# EAGLE board pcbTA 2 habis revisi - Copy (EAGLE 9.6.2)
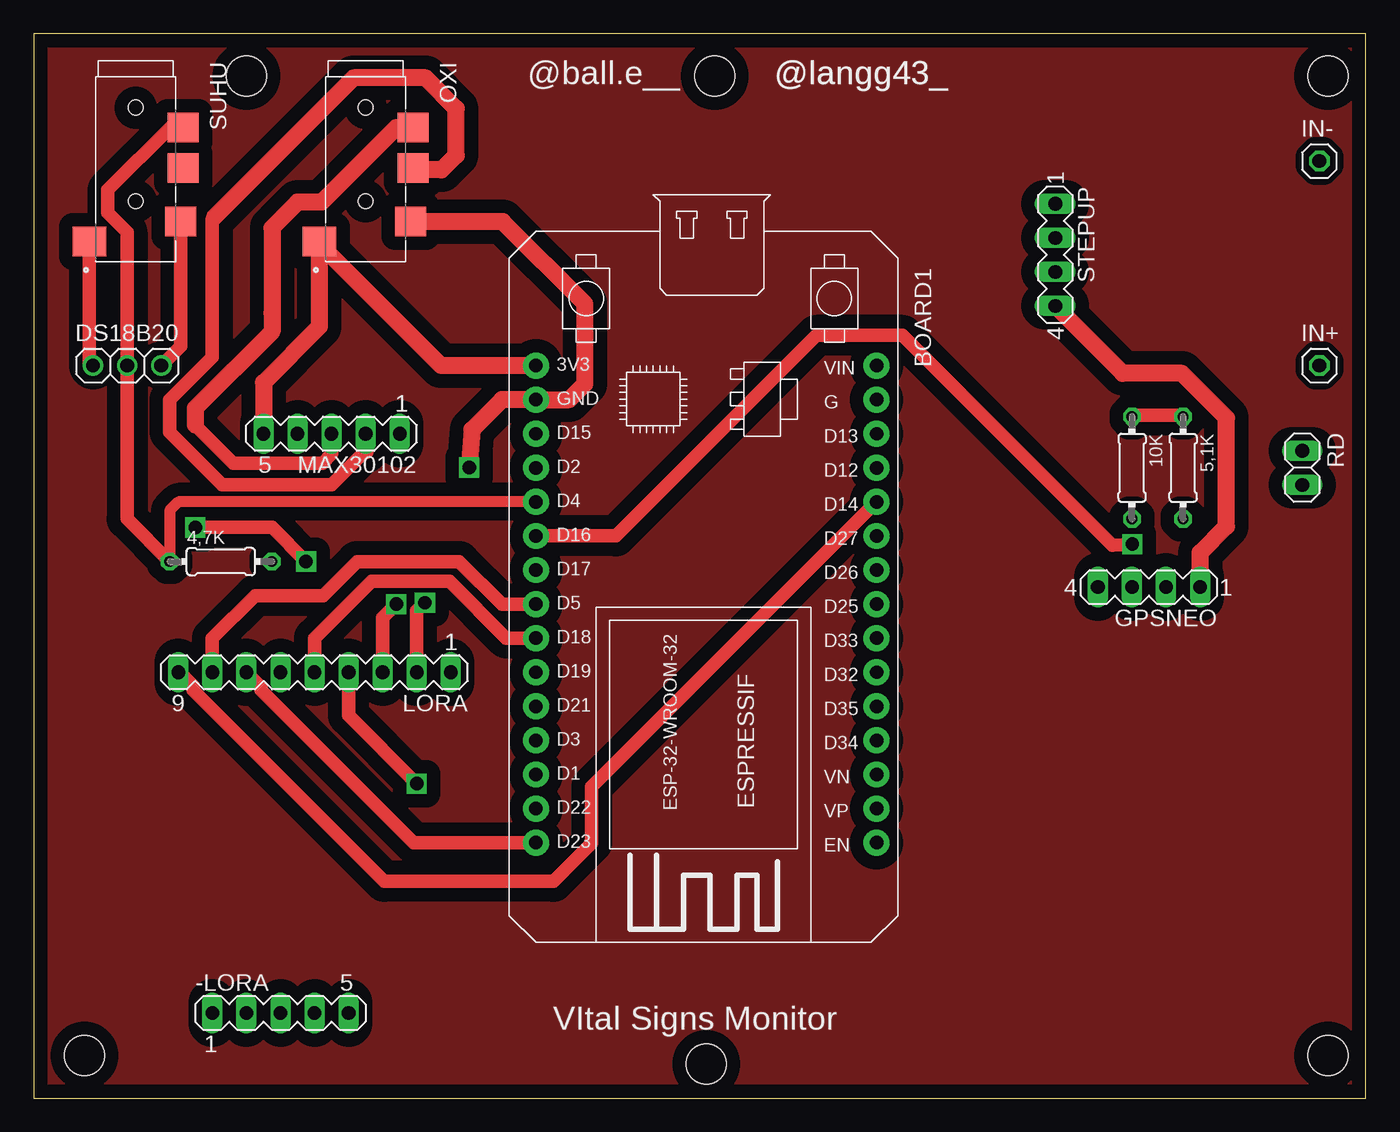
[diagram p0: board, top side]
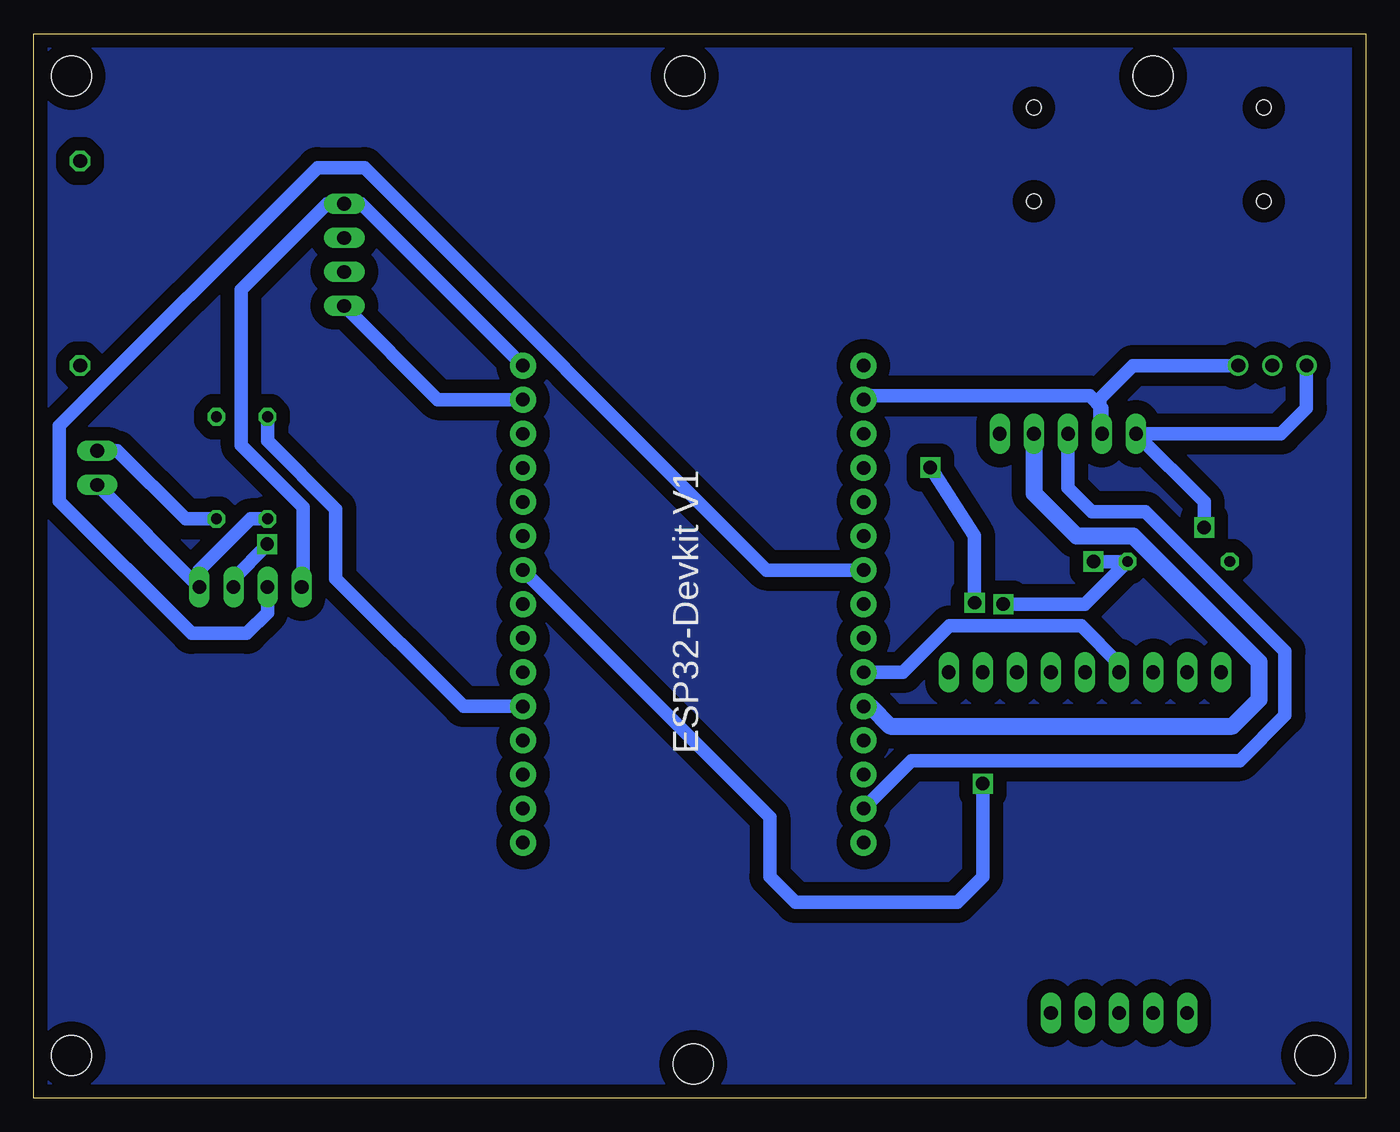
[diagram p1: board, bottom side, seen from below]

Size 99.36 x 79.37 mm. Coordinates in mm from the lower left corner, seen from the top.
Outline: 0,0 99.36,0 99.36,79.37 0,79.37 0,0
Copper layers (1*16): Top 0.035mm / dielectric 1.5mm / Bottom 0.035mm
Design rules "default": minimum track width 6mil, minimum drill 0.35mm, track to track 6mil, track to pad 6mil, pad to pad 6mil, via to via 6mil, smd to smd 6mil, copper to edge 40mil, drill to drill 6mil, minimum pad ring 10mil, minimum via ring 8mil, stop-mask expansion 4mil, vias tented up to drill 0mil, thermal gap 10mil
Holes 3 mm at 96.52,76.2 194.31,74.93 15.88,76.2 96.52,3.17 3.81,3.17 50.16,2.54 50.8,76.2

## Footprints (pad centres in the part's own frame; a part is rotated, then mirrored left to right if it is on the bottom)
0204/7 = drill 0.813 octagon: 1 -3.81,0; 2 3.81,0
MA05-1 = drill 1.016 long: 1 -5.08,0; 2 -2.54,0; 3 0,0; 4 2.54,0; 5 5.08,0
ESP32-DEVKITV1 = drill 1 pad 1.93: 3V3 0,0; D1 30.48,0; D2 7.62,0; D3 27.94,0; D4 10.16,0; D5 17.78,0; D12 7.62,25.4; D13 5.08,25.4; D14 10.16,25.4; D15 5.08,0; D16 12.7,0; D17 15.24,0; D18 20.32,0; D19 22.86,0; D21 25.4,0; D22 33.02,0; D23 35.56,0; D25 17.78,25.4; D26 15.24,25.4; D27 12.7,25.4; D32 22.86,25.4; D33 20.32,25.4; D34 27.94,25.4; D35 25.4,25.4; EN 35.56,25.4; GND 2.54,25.4; GND@1 2.54,0; VIN 0,25.4; VN 30.48,25.4; VP 33.02,25.4
1X03 = drill 1.016: 1 -2.54,0; 2 0,0; 3 2.54,0
MA04-1 = drill 1.016 long: 1 -3.81,0; 2 -1.27,0; 3 1.27,0; 4 3.81,0
1X01 = drill 1.016 octagon: 1 0,0
MA09-1 = drill 1.016 long: 1 -10.16,0; 2 -7.62,0; 3 -5.08,0; 4 -2.54,0; 5 0,0; 6 2.54,0; 7 5.08,0; 8 7.62,0; 9 10.16,0
CUI_SJ2-3574A-SMT-TR = smd 2.2 x 2.5: 1 6,-3.45 | smd 2.2 x 2.3: 2 4.5,3.35; 3 0.5,3.55; 4 -2.5,3.55 | hole 1.1: -4,0; 3,0
1X02 = drill 1.016 long: 1 -1.27,0; 2 1.27,0

## Placement (x,y rotation side)
4,7K  [0204/7]  13.97,40.01 0 top
5,1K  [0204/7]  85.72,46.99 270 top
10K  [0204/7]  81.91,46.99 270 top
-LORA  [MA05-1]  18.41,6.35 0 top
BOARD1  ESP32DEVKITV1  [ESP32-DEVKITV1]  37.47,54.61 270 top
DS18B20  [1X03]  6.99,54.61 0 top
GPSNEO  [MA04-1]  83.18,38.1 180 top
IN+  [1X01]  95.88,54.61 0 top
IN-  [1X01]  95.88,69.85 0 top
LORA  [MA09-1]  20.95,31.75 180 top
MAX30102  [MA05-1]  22.22,49.53 180 top
OXI  SJ2-3574A-SMT-TR  [CUI_SJ2-3574A-SMT-TR]  24.76,69.85 270 top
RD  [1X02]  94.61,46.99 270 top
STEPUP  [MA04-1]  76.2,62.87 270 top
SUHU  SJ2-3574A-SMT-TR  [CUI_SJ2-3574A-SMT-TR]  7.62,69.85 270 top

## Library data of the parts
4,7K 5,1K 10K = rcl; SPICEPREFIX: R
-LORA GPSNEO LORA MAX30102 STEPUP = con-lstb; OC_FARNELL: unknown; OC_NEWARK: unknown
BOARD1 = ESP32-DEVKITV1
DS18B20 = adafruit
IN+ IN- RD = pinhead
OXI SUHU = SJ2-3574A-SMT-TR; AVAILABILITY: In Stock; CHECK_PRICES: https://www.snapeda.com/parts/SJ2-3574A-SMT-TR/Same+Sky/view-part/?ref=eda; DESCRIPTION: 4 conductors, 3.5mm, SMT Audio Jack; MF: Same Sky; MP: SJ2-3574A-SMT-TR; PACKAGE: None; PRICE: None; SNAPEDA_LINK: https://www.snapeda.com/parts/SJ2-3574A-SMT-TR/Same+Sky/view-part/?ref=snap

## Nets
N$1: BOARD1.D21 MAX30102.2 OXI.3
N$2: 4,7K.2 BOARD1.3V3 DS18B20.1 LORA.3 MAX30102.5 OXI.1 SUHU.1
N$3: BOARD1.D14 LORA.9
N$4: 5,1K.2 RD.1
N$5: BOARD1.D5 LORA.8
N$6: BOARD1.D23 LORA.7
N$7: BOARD1.D19 LORA.6
N$8: BOARD1.D18 LORA.5
N$9: BOARD1.D22 MAX30102.3 OXI.4
N$10: BOARD1.D26 LORA.4
N$11: 4,7K.1 BOARD1.D4 DS18B20.2 SUHU.4
N$12: BOARD1.GND@1 DS18B20.3 LORA.2 MAX30102.4 OXI.2 SUHU.2
N$13: BOARD1.VIN GPSNEO.4 STEPUP.1
N$15: 5,1K.1 10K.1 BOARD1.D35
N$17: 10K.2 BOARD1.GND GPSNEO.1 RD.2 STEPUP.4
N$18: BOARD1.D17 GPSNEO.3
N$19: BOARD1.D16 GPSNEO.2

## Tracks (layer width: path | path; a pad name or v marks a point on that pad's centre or on a via)
GND
  pour Top (isolate 1.016): 0,79.38 0,0 99.69,0 99.69,79.38
  pour Bottom (isolate 1.016): 0,79.38 0,0 99.69,0 99.69,79.38
N$1
  Top 0.152: 28.17,69.34 OXI.3
  Top 1.016: 24.76,48.26 22.22,45.72 14.09,45.72 10.16,49.65 10.16,52.07 13.34,55.25 13.34,65.53 13.54,65.74
  Top 1.27: 13.54,65.74 23.85,76.05 29.25,76.05 31.52,73.78 31.52,70.29 30.43,69.19 28.47,69.19 OXI.3 | 24.76,48.26 MAX30102.2
  Bottom 0.152: 37.47,29.26 BOARD1.D21 | 24.66,49.53 MAX30102.2
  Bottom 1.27: BOARD1.D21 36.96,29.21 35.49,27.74 9.95,27.74 7.98,29.71 7.98,32.52 17.37,41.91 21.59,41.91 24.76,45.09 MAX30102.2
N$2  (via drill 1 pad 0.55)
  Top 0.152: 3.63,63.04 SUHU.1 | 21.31,63.7 OXI.1 | 17.2,49.53 MAX30102.5
  Top 1.016: SUHU.1 4.17,54.89 DS18B20.1 | LORA.3 26.04,35.81 v27.05,36.83 | v20.32,40.01 17.78,42.55 v12.06,42.55
  Top 1.27: BOARD1.3V3 30.4,54.61 21.31,63.7 | OXI.1 21.31,57.51 17.14,53.34 MAX30102.5
  Bottom 0.152: 4.55,54.56 DS18B20.1 | 37.47,54.56 BOARD1.3V3
  Bottom 1.016: MAX30102.5 6.35,49.53 4.45,51.44 DS18B20.1 | 15.88,49.53 MAX30102.5 | v27.05,36.83 20.95,36.83 4,7K.2 v20.32,40.01 | v12.06,42.55 12.06,44.45 MAX30102.5
N$3
  Top 0.152: 11.25,31.85 10.79,31.85 LORA.9
  Top 1.016: 10.79,31.85 11.91,30.73 11.91,30.4 26.16,16.15 38.77,16.15 41.63,19.01 41.63,23.22 BOARD1.D14
N$4
  Top 0.152: 85.78,43.28 5,1K.2 | 94.61,48.16 RD.1
  Bottom 1.016: RD.1 93.11,48.26 88.03,43.18 5,1K.2
N$5
  Top 1.016: BOARD1.D5 34.93,36.83 31.75,40.01 24.13,40.01 21.59,37.47 16.51,37.47 13.34,34.29 LORA.8
  Bottom 0.152: 13.39,31.85 LORA.8
N$6
  Top 1.016: LORA.7 16.99,30.63 16.99,30.4 28.34,19.05 BOARD1.D23
N$7
  Bottom 1.016: LORA.6 18.41,32.38 21.23,35.2 31.07,35.2 34.52,31.75 BOARD1.D19
N$8
  Top 1.016: BOARD1.D18 35.25,34.29 31.01,38.53 25.19,38.53 20.95,34.29 LORA.5
N$9
  Top 0.152: 27.71,72.24 28.17,72.24 OXI.4
  Top 1.016: MAX30102.3 22.22,48.03 21.54,47.35 14.88,47.35 12.06,50.16
  Top 1.27: OXI.4 27.04,72.35 21.49,66.79 19.69,66.79 17.78,64.88 17.78,58.53 17.78,57.15 12.06,51.44 12.06,50.16
  Bottom 0.152: MAX30102.3 22.22,49.38 | 37.47,21.64 BOARD1.D22
  Bottom 1.016: BOARD1.D22 33.88,25.17 9.41,25.17 6.04,28.54 6.04,33.31 16.45,43.71 20.45,43.71 22.22,45.49 MAX30102.3
N$10  (via drill 1 pad 0.55)
  Top 1.016: v28.57,23.45 23.49,28.53 LORA.4
  Bottom 1.016: BOARD1.D26 44.45,20.95 44.45,16.51 42.55,14.61 30.48,14.61 28.57,16.51 v28.57,23.45
N$11
  Top 0.152: SUHU.4 10.68,71.86 10.49,71.93 | 10.11,40.06 4,7K.1 | 37.47,44.5 BOARD1.D4
  Top 0.813: 4,7K.1 10.16,43.82 10.79,44.45 BOARD1.D4
  Top 1.016: SUHU.4 11.14,72.38 10.22,72.38 5.55,67.71 5.55,65.99 6.99,64.55 DS18B20.2 6.99,43.18 4,7K.1
N$12  (via drill 1, 1 pad 0.55)
  Top 0.152: 10.89,65.29 SUHU.2 | 28.17,65.23 OXI.2 | 37.47,52.12 BOARD1.GND@1
  Top 1.016: SUHU.2 10.97,56.05 DS18B20.3 | LORA.2 28.57,36.32 v29.18,36.93
  Top 1.27: OXI.2 34.98,65.35 41.12,59.21 41.12,53.25 39.94,52.07 BOARD1.GND@1 34.93,52.07 32.69,49.83 v32.49,47.02
  Bottom 0.152: 37.47,51.97 BOARD1.GND@1
  Bottom 1.016: v32.49,47.02 29.26,42.04 29.18,41.91 v29.18,36.93 | DS18B20.3 17.38,54.61 19.84,52.15 19.84,49.68 MAX30102.4 19.68,51.44 20.6,52.35 37.19,52.35 BOARD1.GND@1
N$13
  Bottom 1.016: GPSNEO.4 79.26,38.22 79.26,44.05 83.87,48.67 83.87,60.27 77.47,66.67 STEPUP.1 74.93,66.67 BOARD1.VIN
N$15
  Top 0.152: 81.97,50.9 10K.1 | 85.62,50.9 5,1K.1
  Top 1.016: 85.62,50.9 81.97,50.9
  Bottom 1.016: 10K.1 81.91,49 76.82,43.9 76.82,38.72 67.31,29.21 BOARD1.D35
N$17
  Top 0.152: 81.81,43.28 10K.2
  Top 1.27: GPSNEO.1 86.99,40.68 88.95,42.63 88.95,50.71 85.64,54.03 81.23,54.03 STEPUP.4
  Bottom 1.016: STEPUP.4 69.21,52.07 BOARD1.GND | 10K.2 83.18,43.18 86.99,39.37 GPSNEO.1 RD.2
N$18
  Bottom 1.016: GPSNEO.3 81.91,36.2 83.46,34.65 87.58,34.65 97.43,44.5 97.43,50.12 78.19,69.37 74.69,69.37 44.69,39.37 BOARD1.D17
N$19  (via drill 1 pad 0.55)
  Top 1.016: v81.94,41.3 80.46,41.22 64.81,56.87 58.38,56.87 43.42,41.91 BOARD1.D16
  Bottom 1.016: GPSNEO.2 84.45,38.73 81.94,41.25 v81.94,41.3

## Text on the board
tNames: @ball.e__ | @langg43_ | @langg43_ | VItal Signs Monitor